# Altium PCB Mini-Rambo-ATX.PcbDoc (part 3 of 3)
Units mil, origin at the board's own origin, x right, y up, seen from the top; angles counter-clockwise.
Board outline 4133.86 x 2795.28 mil, 4 copper layers (Top, GND, Supply, Bottom), stack 61.811 mil thick; 252 components, 203 nets, 844 pads, 559 vias.
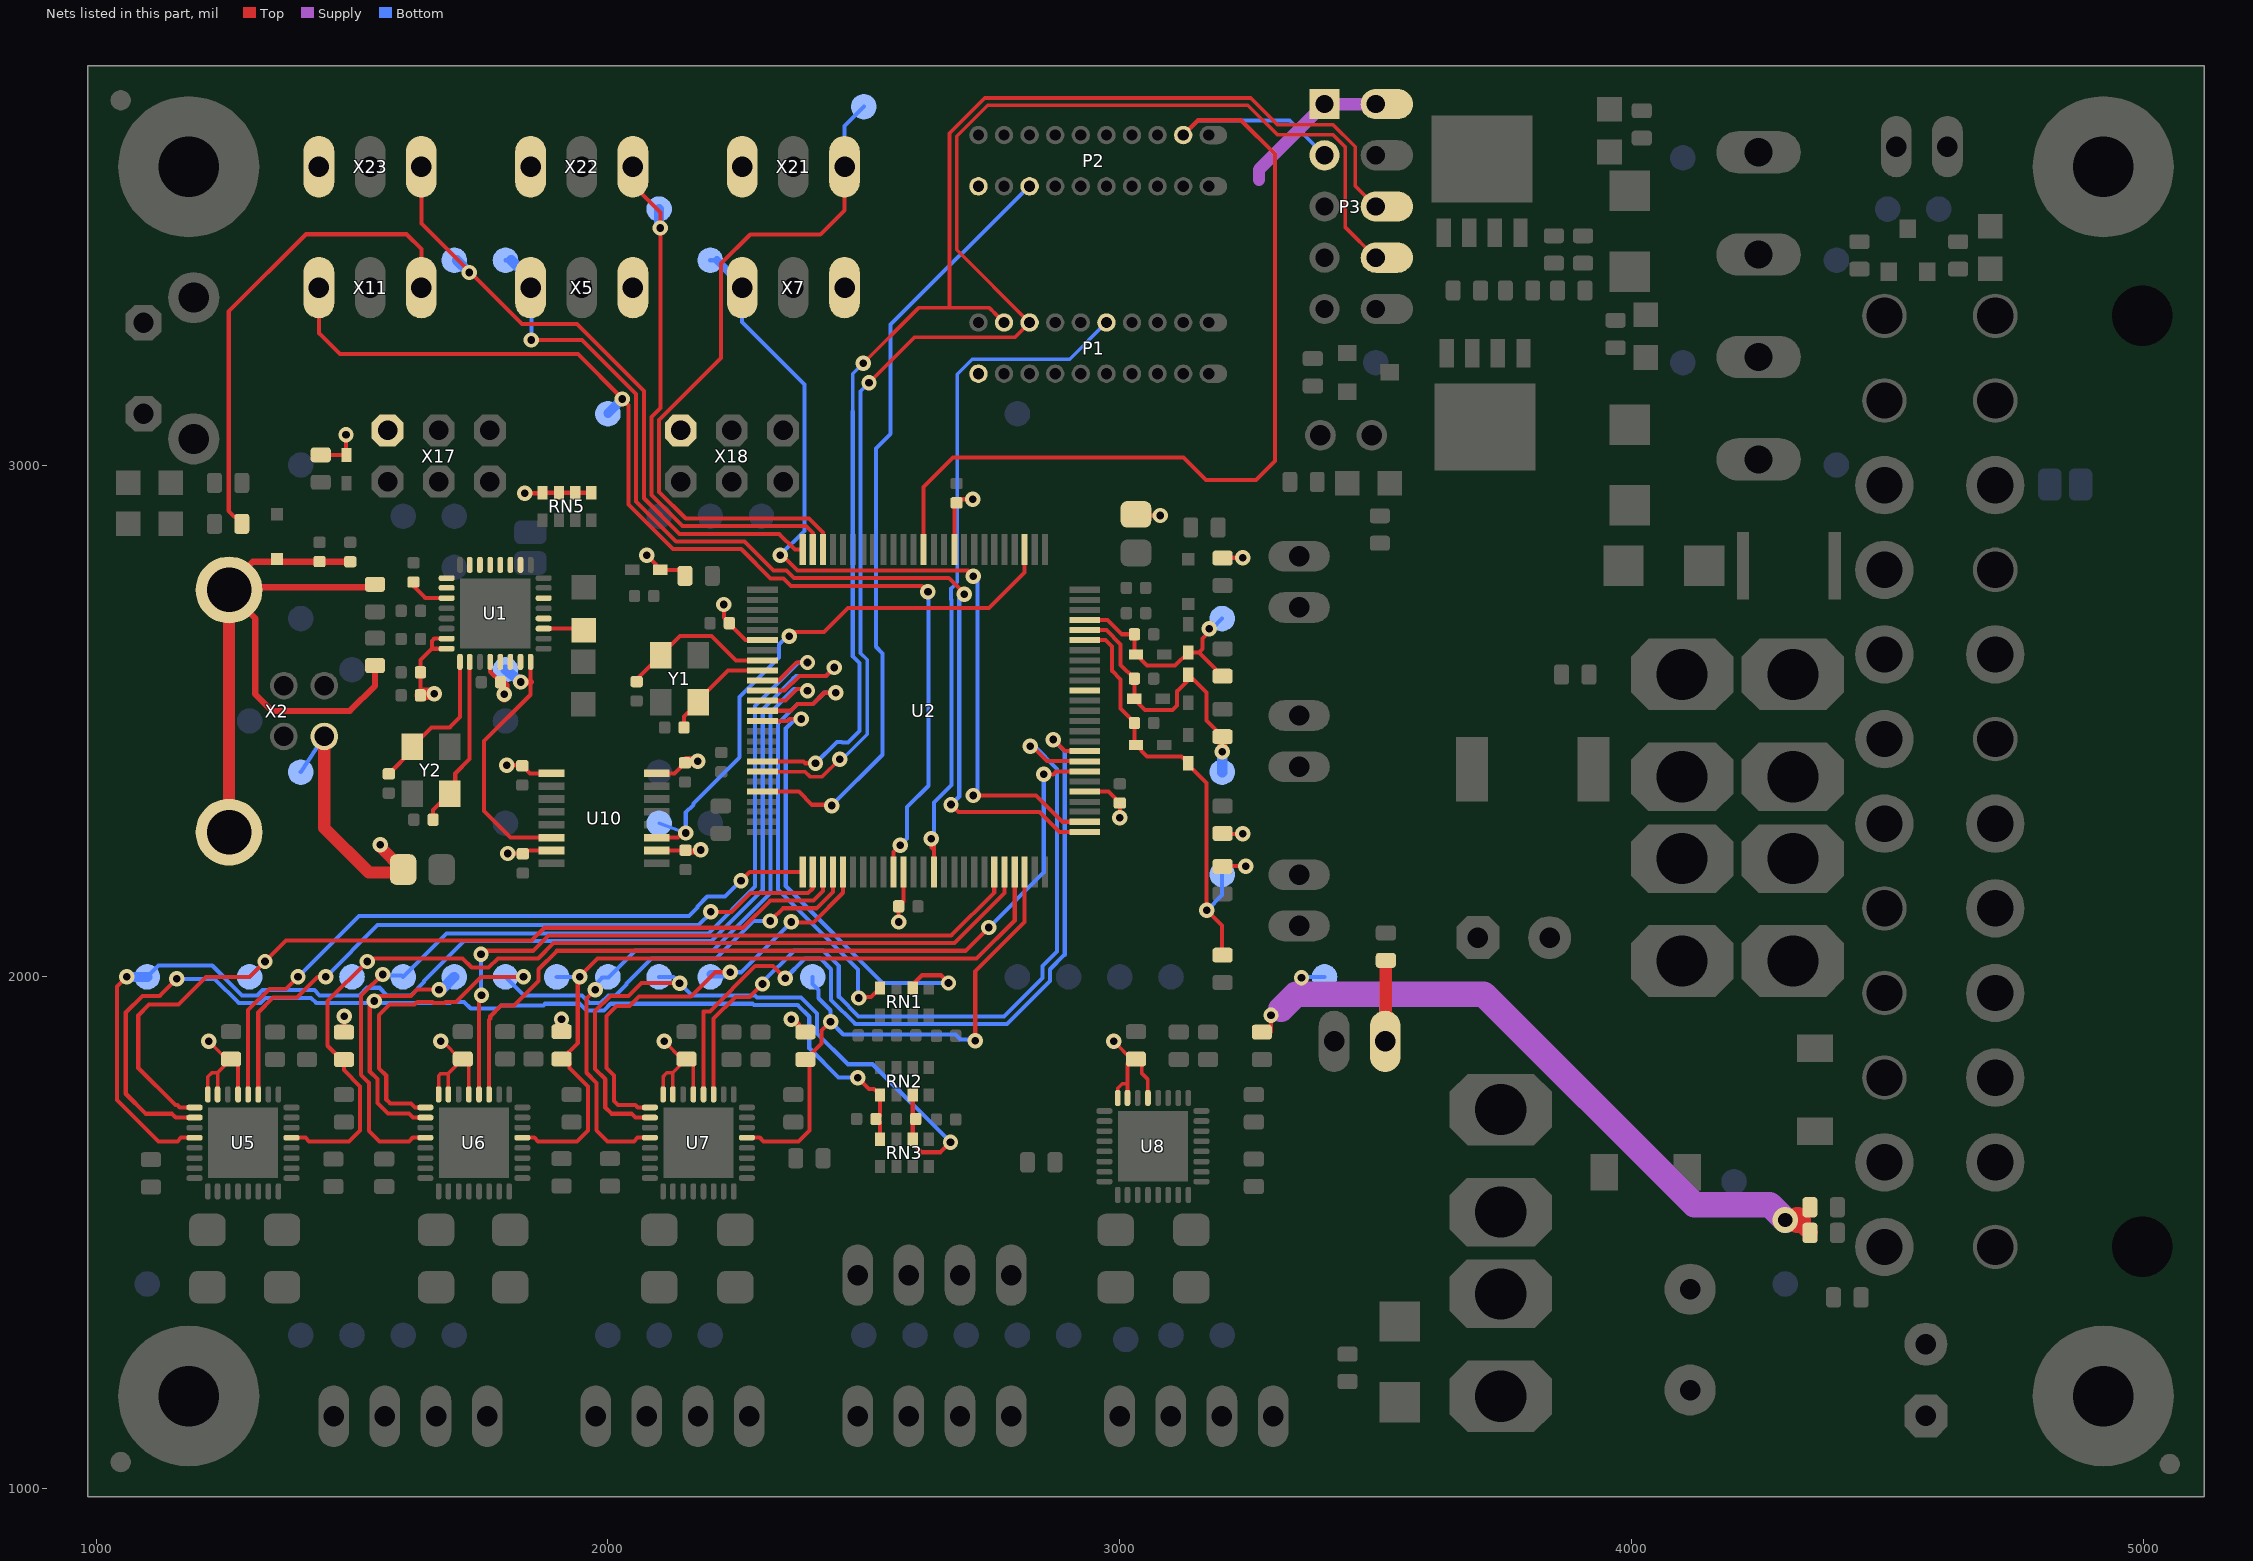
[diagram p5: the nets of this part, all layers, seen from the top]

## Via types
v1: diameter 30, hole 15, Top to Bottom, 422 vias
v2: diameter 30, hole 15, Top to Bottom, tented both sides, 131 vias
v3: diameter 50, hole 28, Top to Bottom, tented both sides, 3 vias
v4: diameter 32, hole 15, Top to Bottom, 1 vias
v5: diameter 30, hole 15, Top to Bottom, tented top, 1 vias
v6: diameter 32, hole 15, Top to Bottom, tented both sides, 1 vias

## Nets (pads, with @x,y where several pads share a name; then routed paths per layer and width w, separated by ;. In a path a pad name is that pad's centre, name@x,y a point inside that pad or via, vN(x,y) a via of type N, cw(c..) or ccw(c..) an arc to the next point about the centre after c; other vN are vias at no path point) (continued)
SCL: P1.P$4 P3.6 U2.43 | length 2617.2
  Top w7: v1(2499,3199) 2606.85,3306.85 2668,3306.85 ; 2755.58,3296.58 2745.32,3306.85 2668,3306.85 ; P3.6@3500,3505 3459.97,3545.03 3459.97,3621.43 3416.43,3664.97 3308.03,3664.97 3256.01,3716.99 2736.22,3716.99 2667.32,3648.09 2667.32,3307.53 2668,3306.85
  Top w8: U2.43@2301.83,2421 2381.89,2421 2385.57,2417.32 v1(2405.51,2417.32) ; 2755.58,3296.58 P1.P$4@2773.82,3278.35
  Bottom w7: 2478.38,3105 2478.38,3178.38 v1(2499,3199)
  Bottom w8: v1(2405.51,2417.32) 2447.38,2459.19 2456.76,2459.19 2457.74,2458.21 2469.38,2458.21 2491.33,2480.15 2491.33,2613.35 2478.38,2626.3 2478.38,3105
SDA: P1.P$6 P3.8 U2.44 | length 2801
  Top w7: U2.44@2301.83,2401 2385.06,2401 2394.74,2391.32 2418.88,2391.32 v1(2452.75,2425.19) ; v1(2510,3161) 2598.85,3249.85 2795.32,3249.85 P1.P$6@2823.82,3278.35 2823.27,3278.35 2681.32,3420.3 2681.32,3642.29 2742.01,3702.99 3250.01,3702.99 3307.97,3645.03 3416.58,3645.03 3440.03,3621.58 3440.03,3464.97 P3.8@3500,3405
  Bottom w7: v1(2452.75,2425.19) 2452.75,2426.42 2445.99,2433.19 2465.58,2433.19 2506.33,2473.94 2506.33,2619.56 2493.38,2632.52 2493.38,3144.38 v1(2510,3161)
THERM0: C59.1 D11.A D13.C R32.1 TP20.TP U2.97 | length 447.1
  Top w8: U2.97@2931.79,2697.17 2976.06,2697.17 3003.94,2669.29 C59.1@3028.54,2669.29 3028.54,2630.91 3029.32,2631.68 3053.08,2607.92 3107.92,2607.92 D11.A@3133.86,2633.86 3154.33,2633.86 ; v2(3175,2680) 3175,2675 3161.42,2661.42 3161.42,2640.94 3154.33,2633.86 ; R32.1@3200.78,2587.4 3154.33,2633.86
  Bottom w8: v2(3175,2680) 3180,2680 TP20.TP@3200,2700
THERM1: C56.1 D14.A D15.C R37.1 TP21.TP U2.96 | length 584.7
  Top w8: U2.96@2931.79,2677.48 2973.65,2677.48 3001.56,2649.58 3001.56,2609.66 C56.1@3028.54,2582.68 D15.C@3028.54,2542.32 ; D15.C@3027.56,2543.31 D15.C@3028.54,2542.32 ; v2(3200,2440) v2@3200.78,2440.78 ; R37.1@3200.78,2469.29 3169.1,2500.98 3169.1,2555.31 D14.A@3133.86,2590.55 3133.86,2579.93 3111.86,2557.93 3111.86,2530.53 3102.63,2521.31 3049.56,2521.31 D15.C@3028.54,2542.32
  Top w20: v2@3200.78,2440.78 R37.1@3200.78,2469.29
  Bottom w20: TP21.TP@3200,2400 v2(3200,2440)
THERM2: C4.1 D1.A D5.C R6.1 TP15.TP U2.95 | length 872
  Top w8: U2.95@2931.79,2657.8 2972.13,2657.8 2984.56,2645.36 2984.56,2598.12 3001.56,2581.12 3001.56,2524.38 3028.54,2497.4 C4.1@3028.54,2496.06 3028.54,2455.71 D5.C@3031.5,2452.76 3053.5,2430.76 3120.43,2430.76 D1.A@3133.86,2417.32 3133.86,2413.82 3169.11,2378.57 3169.11,2296.44 3169.1,2145 3170,2144.1 v2(3170,2130) 3200,2100 3200,2043.3 R6.1@3200.78,2042.52
  Bottom w8: v2(3170,2130) 3200,2160 TP15.TP@3200,2200
THERM3: U2.90
TX0: TP31.TP U2.3 U10.11 | length 1145.9
  Top w8: U10.11@2095.13,2272.04 2136.99,2272.04 v1@2145.3,2280.35 ; v1(2354.33,2665.35) 2354.33,2670.22 2358.04,2673.93 2422.3,2673.93 2469.03,2720.66 2744.09,2720.66 2813.79,2790.35 U2.3@2813.79,2834.96
  Bottom w7: TP31.TP@2100,2300 v1(2152,2281)
  Bottom w8: v1(2152,2281) 2152,2321.23 2167,2336.23 2167,2338.62 2257.41,2429.03 2257.41,2546.85 2334.12,2623.56 2334.12,2649.09 2354.45,2669.42 2354.45,2670.34 2354.33,2670.22 v1(2354.33,2665.35)
TX0-I: TP26.TP U1.8 U10.6 | length 554.7
  Top w8: U1.8@1848.9,2615.51 1848.43,2615.04 1848.43,2566 1848.43,2551.18 1758.17,2460.92 1758.17,2323.91 1810.04,2272.04 U10.6@1889.76,2272.04
  Top w14: v2@1827,2576 1848.43,2576
  Bottom w7: v2@1827,2566 1828,2565 v2(1830,2576)
  Bottom w20: TP26.TP@1800,2600 v2(1830,2576)
TX1: P2.P$5 U2.46 | length 1527.5
  Top w8: U2.46@2301.83,2362 2372.87,2362 2398.67,2336.2 v1@2437,2336.2
  Bottom w8: v1(2437,2334.64) 2536.33,2433.97 2536.33,2631.99 2523.38,2644.94 2523.38,3032.38 2552,3061 2552,3274.11 2822.38,3544.49 P2.P$5@2823.82,3544.49
TX2: P2.P$18 P3.3 U2.13 | length 2000.1
  Top w8: U2.13@2616.79,2834.96 2616.79,2957.26 2674.37,3014.85 3124.76,3014.85 3168.61,2971 3266.2,2971 3302.98,3007.79 3302.98,3607.52 3237.02,3673.49 3152.82,3673.49 P2.P$18@3123.82,3644.49
  Bottom w7: P2.P$18@3123.82,3644.49 3152.32,3672.99 3332.01,3672.99 P3.3@3400,3605
TX3: P1.P$12 U2.64 | length 1353
  Top w8: v1(2631.89,2269.68) 2631.89,2252.93 2636.79,2248.03 ; U2.64@2636.79,2205 2636.79,2248.03 ; v1@2636.79,2271.65 2636.79,2248.03
  Bottom w7: 2670.3,2758.47 2682.5,2770.67 2682.5,3177.33 2712.01,3206.85 2902.32,3206.85 P1.P$12@2973.82,3278.35
  Bottom w8: v1(2631.89,2269.68) 2636.68,2274.48 2636.68,2340.42 2671.33,2375.07 2671.33,2735.91 2670.3,2736.94 2670.3,2758.47
TXL: LED4.C U1.11 | length 79.5
  Top w8: U1.11@1874.49,2680.47 1949.77,2680.47 LED4.C@1952.76,2677.49
U1-PB0: U1.14
U1-PB4: U1.18
U1-PB5: U1.19
U1-PB6: U1.20
U1-PB7: U1.21
U1-PC2: U1.5
U1-PC4: U1.26
U1-PC5: U1.25
U1-PC6: U1.23
U1-PC7: U1.22
U1-PD0: U1.6
U1-PD1: U1.7
U1-PD6: U1.12
USBVCC: C2.2 C11.1 C14.1 C15.1 C67.2 C70.1 D4.C R47.2 RN5.1 RN5.2 RN5.3 RN5.4 TP46.TP U1.4 U1.31 U1.32 U10.1 U10.7 X2.1 X17.2 | length 1208.3
  Top w8: R47.2@1438.97,3019.89 1439.17,3019.69 D4.C@1489.17,3019.69 1488.19,3020.67 v1(1488.19,3059.06) ; C11.1@1633.7,2550 C15.1@1633.7,2595 1633.7,2618.7 1656.1,2641.1 ; U1.32@1685,2641.1 1656.1,2641.1 ; U1.31@1685,2660.79 1660.79,2660.79 1656.1,2656.1 1656.1,2641.1 ; U1.4@1770,2615.51 1770,2596.14 C14.1@1790.35,2575.79 C14.1@1797.24,2568.9 ; v1(1802.17,2413.39) 1831.69,2413.39 C70.1@1832.68,2412.4 1847.54,2397.54 U10.1@1889.76,2397.54 ; v1(1804.13,2241.14) 1832.98,2241.14 C67.2@1833.66,2240.46 1840.24,2247.04 U10.7@1889.76,2247.04 ; v1(1837.6,2944.88) 1871.29,2944.88 RN5.4@1872.28,2945.87 RN5.3@1904.28,2945.87 RN5.2@1936.02,2945.87 RN5.1@1967.52,2945.87
  Top w20: v1@1797.24,2546.26 C14.1@1797.24,2568.9
  Top w24: X2.1@1445.84,2469.68 1445.84,2290.9 1533,2203.74 1593.89,2203.74 C2.2@1599.8,2209.65 1555.12,2254.32 v1(1555.12,2257.87) ; C11.1@1633.7,2550 1636.85,2553.15 v1(1660.43,2553.15)
  Bottom w8: TP46.TP@1400,2400 X2.1@1445.84,2469.68
  other v1: 1797.24,2552
USHIELD: C63.1 D16.A R72.2 RV1.1 RV2.1 X2.P$1 X2.P$2 | length 1561.9
  Top w12: X2.P$1@1257.58,2753.64 1250,2761.22 X2.P$1@1256.22,2761.22 ; X2.P$1@1259.84,2751.38 1311,2700.22 1311,2552.33 1343.64,2519.68 1496.06,2519.68 1545,2568.62 RV1.1@1545,2608.23 ; R72.2@1496.5,2811.01 1306.01,2811.01 X2.P$1@1256.22,2761.22 ; RV2.1@1539.45,2761.22 X2.P$1@1256.22,2761.22
  Top w24: X2.P$2@1259.84,2282.68 1259.84,2751.38 X2.P$1@1259.84,2755.91
VCC: C7.1 C8.1 C9.1 C17.1 C18.1 C23.1 C24.1 C25.1 C52.1 C68.2 C69.1 D3.C L2.1 P1.P$1 P2.P$1 P3.1 P3.2 R5.2 R31.2 R35.1 R36.2 R46.2 R59.1 R60.1 R61.1 R62.1 R74.1 R75.2 TP32.TP U2.10 U2.31 U2.61 U2.80 U5.13 U5.15 U5.16 U6.13 U6.15 U6.16 U7.13 U7.15 U7.16 U8.13 U8.15 U8.16 U10.10 U10.16 X1.2 X5.3 X7.3 X11.3 X18.2 X21.3 X22.3 X23.3 | length 4917.8
  Top w7: U5.16@1218.4,1770.5 1218.4,1805.02 1226.38,1812.99 1237.4,1812.99 ; v2(1220.47,1874.02) 1255.12,1839.37 C24.1@1263.78,1839.37 ; U5.15@1237.4,1770.5 1237.4,1812.99 ; U5.13@1277.4,1770.5 1277.4,1825.75 C24.1@1263.78,1839.37 ; U6.16@1669.31,1770.5 1669.31,1807.1 1673.35,1811.14 1688.31,1811.14 ; v2(1673.23,1874.02) 1677.17,1874.02 1711.81,1839.37 C23.1@1716.54,1839.37 ; U6.15@1688.31,1770.5 1688.31,1811.14 ; U6.13@1728.31,1770.5 1728.31,1827.6 C23.1@1716.54,1839.37 ; U7.16@2107.93,1770.5 2107.93,1805.46 2115.23,1812.76 2126.93,1812.76 ; v2(2110.24,1874.02) 2144.88,1839.37 C18.1@2153.54,1839.37 ; U7.15@2126.93,1770.5 2126.93,1812.76 ; U7.13@2166.93,1770.5 2166.93,1825.98 C18.1@2153.54,1839.37 ; v2(2988.19,1874.02) C17.1@3022.83,1839.37 ; U8.16@2995.96,1763.61 2995.96,1782.73 3004.57,1791.34 3014.96,1791.34 ; U8.15@3014.96,1763.61 3014.96,1791.34 ; U8.13@3054.96,1763.61 3054.96,1799.37 3043.23,1811.1 3043.23,1827.64 C17.1@3031.5,1839.37 C17.1@3022.83,1839.37 ; 1237.4,1812.99 C24.1@1263.78,1839.37 ; 1688.31,1811.14 C23.1@1716.54,1839.37 ; 2126.93,1812.76 C18.1@2153.54,1839.37 ; 3014.96,1791.34 3014.96,1831.5 C17.1@3022.83,1839.37
  Top w8: R35.1@1284.77,2885 1259.2,2910.57 1259.2,3299.56 1410.43,3450.79 1606.3,3450.79 1635.43,3421.65 X11.3@1635.43,3346.46 ; R60.1@1484.26,1891.93 1485,1892.67 v1(1485,1923) ; v1(2075.79,2823.82) 2102.36,2797.24 D3.C@2102.36,2795.28 2138.58,2795.28 R46.2@2150.39,2783.46 ; U10.10@2095.13,2247.04 2151.27,2247.04 C68.2@2151.57,2247.35 2151.87,2247.05 2180.12,2247.05 2176.42,2243.35 C68.2@2161.49,2243.35 ; U10.16@2095.13,2397.54 2129.82,2397.54 C69.1@2150.59,2418.31 C69.1@2153.66,2421.38 ; v1(2226.38,2727.36) 2226.38,2701.77 C9.1@2237.2,2690.94 2237.2,2689.02 2268.43,2657.8 U2.31@2301.83,2657.8 ; v1(2567.91,2107.28) C7.1@2567.91,2137.8 2577.42,2147.3 U2.61@2577.42,2205 ; U2.10@2676.79,2834.96 2676.79,2921.87 C52.1@2681.1,2926.18 2687.99,2933.07 v1(2712.6,2933.07) ; U2.80@2931.79,2362 2977.57,2362 C8.1@3000,2339.57 3000,2311.02 v1@2997.57,2308.59 ; v1@2997.6,2308.59 v1(3000.15,2311.14) ; L2.1@3031.5,2903.54 3033.47,2901.57 3078.74,2901.57 v1(3078.89,2901.42) ; R5.2@3200.78,2215.75 3201.57,2216.54 v1@3240.16,2216.54 ; R36.2@3200.79,2280.31 3201.57,2279.53 v1(3240.16,2279.53) ; R31.2@3200.78,2818.11 3201.57,2818.9 v1(3240.16,2818.9) ; R62.1@3295.28,1892.1 v1(3295.28,1925.19)
  Top w12: v1(2358.27,1917.32) 2360.61,1917.32 R61.1@2385.83,1892.1
  Top w20: C69.1@2153.66,2421.38 v1(2175.3,2421.38)
  Top w24: X1.2@3518.5,1874.02 3519.68,1875.2 C25.1@3519.68,2032.28
  Top w32: v3(4300,1525) 4323.23,1525 R74.1@4348.23,1500
  Top w50: v3@4323.23,1525 4325,1525
  Supply w8: 3343.97,1966.02 3355,1977.05 v2(3355,1998)
  Supply w24: 3272,3557 3272,3577 P3.1@3400,3705 P3.2@3500,3705 ; 3515.75,1966.02 3518.5,1963.26 X1.2@3518.5,1874.02
  Supply w50: 3314.96,1937.01 3343.97,1966.02 3515.75,1966.02 3711.15,1966.02 4122.05,1555.12 4269.88,1555.12 v3(4300,1525)
  Bottom w8: v2(3355,1998) 3357,2000 TP32.TP@3400,2000
  other v1: 1909.45,1917.32 3246,2216 2181.1,2248.03
VUCAP: C16.1 U1.27 | length 74.6
  Top w8: C16.1@1620,2763.23 1643.23,2740 U1.27@1685,2740
X-DIR: TP1.TP U2.36 U5.20 | length 2504.4
  Top w8: v2(1060,2000) 1041.01,1981.01 1041.01,1759.21 1121.69,1678.54 1158.99,1678.54 1166.31,1685.85 U5.20@1192.4,1685.85 ; U2.36@2301.83,2559.37 2345.24,2559.37 2374.04,2588.17 2425.76,2588.17 v1(2442.05,2604.46)
  Bottom w8: TP1.TP@1100,2000 1122.06,2022.06 1227.03,2022.06 1285.09,1964 1314.91,1964 1324.91,1974 1426.5,1974 1436.5,1964 1514.91,1964 1529.66,1978.75 1554.07,1978.75 1568.83,1964 1614.91,1964 1640.91,1990 1640.91,1991.82 1719.09,2070 2202.38,2070 2302.41,2170.03 2302.41,2522.69 2361.91,2582.19 2361.91,2582.75 2367.33,2588.17 2425.76,2588.17 v1(2442.05,2604.46)
  Bottom w20: v2(1060,2000) TP1.TP@1100,2000
X-EN: R60.2 TP4.TP U2.71 U5.5 | length 1935.6
  Top w8: U5.5@1381.89,1685.85 1408.84,1685.85 1416.15,1678.54 1494.26,1678.54 1515.94,1700.21 1515.94,1786.06 1484.26,1817.74 R60.2@1484.26,1838.38 1479.62,1838.38 1452.57,1865.43 1452.57,1952.57 v2(1530,2030) 1536,2036 1716,2036 1734,2018 1767.09,2018 1785.09,2036 1863.88,2036 1893.88,2066 2676.87,2066 2774.79,2163.92 U2.71@2774.79,2205
  Bottom w8: TP4.TP@1500,2000 v2(1530,2030)
X-MAX: TP39.TP U2.76 X5.1 | length 2063.7
  Top w8: v1(1850.39,3244.09) 1949.67,3244.09 2055.13,3138.64 2055.13,2928.86 2133.43,2850.56 2266.67,2850.56 2323.69,2793.54 2349.21,2793.54 2363.8,2778.96 2665.92,2778.96 2696.3,2748.58 v1(2696.3,2747.7) ; v1(2670.28,2336.61) 2684.78,2322.11 2843.24,2322.11 2882.35,2283 U2.76@2931.79,2283
  Bottom w8: TP39.TP@1800,3400 TP39.TP@1811,3400 ; X5.1@1848.82,3362.18 X5.1@1848.82,3346.46 1850.39,3344.88 v1(1850.39,3244.09) ; v1(2670.28,2336.61) 2686.33,2352.67 2686.33,2737.74 v1(2696.3,2747.7)
  Bottom w20: TP39.TP@1811,3400 X5.1@1848.82,3362.18
X-MIN: TP38.TP U2.25 X23.1 | length 1287.6
  Top w8: X23.1@1635.43,3582.68 1635.43,3471.86 v2@1731.29,3376 ; v2(1729,3376) v2@1731.29,3376 ; v2@1735,3376 v2@1731.29,3376 ; U2.25@2380.57,2834.96 2365.24,2834.96 2334.65,2865.56 2139.64,2865.56 2070.13,2935.08 2070.13,3144.86 1939.53,3275.46 1831.84,3275.46 v2@1731.29,3376
  Bottom w8: TP38.TP@1700,3400 TP38.TP@1705,3400
  Bottom w20: TP38.TP@1705,3400 v2(1729,3376)
X-MS1: U2.52 U5.11 | length 1378.1
  Top w8: U5.11@1316.93,1770.5 1316.93,1930.74 1345.83,1959.65 1392.72,1959.65 1433.07,2000 v1(1448.82,2000) ; v1(2200.89,2127.07) 2202,2127.07 2241.25,2127.07 2278.17,2164 2391.12,2164 2400.25,2173.13 U2.52@2400.25,2205
  Bottom w8: v1(1448.82,2000) 1549.82,2101 2177,2101 2202,2126 v1(2200.89,2127.07)
X-MS2: U2.51 U5.12 | length 1361
  Top w8: U5.12@1297.24,1770.5 1297.24,1935.1 1338.79,1976.65 1371.06,1976.65 v1(1394.42,2000) ; v1(2260,2188) 2277,2205 U2.51@2380.57,2205
  Bottom w8: v1(1394.42,2000) 1513.42,2119 2158.23,2119 2174.89,2135.66 2174.89,2137.84 2194.05,2157 2229,2157 v1(2260,2188)
X-STEP: TP2.TP U2.53 U5.17 | length 1762.5
  Top w8: U5.17@1192.4,1744.91 1163.56,1744.91 1158.93,1749.54 1155.21,1749.54 1082.48,1822.26 1082.48,1924.84 1103.64,1946 1160.77,1946 1214.77,2000 1300,2000 v2(1330,2030) 1371,2071 1851,2071 1876,2096 2264.21,2096 2317.21,2149 2401.5,2149 2419.94,2167.44 U2.53@2419.94,2205
  Bottom w8: TP2.TP@1300,2000 v2(1330,2030)
XT1: C13.1 U1.1 Y2.1 | length 297.2
  Top w8: C13.1@1571.85,2396.65 1617.54,2442.34 Y2.1@1617.54,2449.4 1655.54,2487.4 1690.94,2487.4 1711,2507.45 U1.1@1711,2615.51
XT2: C12.1 U1.2 Y2.3 | length 313.6
  Top w8: C12.1@1658.46,2307.09 1658.46,2325.63 Y2.3@1690.95,2358.12 ; Y2.3@1703.74,2378.94 1701.77,2380.91 1701.77,2397.66 1729.65,2425.54 1729.65,2615.17 U1.2@1730,2615.51
XTAL1: C57.1 U2.34 Y1.1 | length 214.5
  Top w8: C57.1@2148.62,2487.2 2148.62,2508.77 Y1.1@2176.56,2536.72 2176.56,2540.96 2234.35,2598.74 U2.34@2301.83,2598.74
XTAL2: C58.1 U2.33 Y1.3 | length 304.8
  Top w8: C58.1@2056.1,2576.77 2056.1,2580.95 Y1.3@2103.15,2627.99 2141.15,2665.99 2202.53,2665.99 2250.1,2618.43 U2.33@2301.83,2618.43
XY-REF: C48.1 RN2.5 RN3.4 TP6.TP U5.18 U6.18 | length 2556.3
  Top w8: v1(1157.48,1996.06) 1124.42,1963 1090.74,1963 1058.01,1930.28 1058.01,1771.71 1097.19,1732.54 1107.88,1732.54 1148.37,1732.54 1155.69,1725.22 U5.18@1192.4,1725.22 ; U6.18@1643.31,1725.22 1619.07,1725.22 1611.02,1733.27 1570.45,1733.27 1549.94,1753.79 1549.94,1800.14 1534.69,1815.39 1534.69,1944.14 v1(1543.3,1952.75) 1553.55,1963 1615.33,1963 1627.33,1975 v2(1670,1975) ; v1(2488.19,1803.15) 2510.04,1781.3 2519.68,1781.3 RN2.5@2531.72,1769.26 2531.72,1727.59 2526.57,1722.44 2531.72,1717.29 RN3.4@2531.72,1683.07
  Bottom w8: v1(1157.48,1996.06) 1231.81,1996.06 1278.88,1949 1321.12,1949 1331.12,1959 1420.29,1959 1430.29,1949 1539.55,1949 v1(1543.3,1952.75) 1547.06,1949 1691.76,1949 1693.95,1951.2 1718.8,1951.2 1732,1938 1785.08,1938 1791.48,1944.4 1874.02,1944.4 1877.17,1947.56 1944.46,1947.56 1958.02,1934 1991.98,1934 2005.54,1947.56 2282.46,1947.56 2285.27,1944.74 2370.78,1944.74 2393.4,1922.12 2393.4,1860.6 2450.85,1803.15 v1(2488.19,1803.15) ; v2(1670,1975) v2@1675,1975
  Bottom w20: v2@1675,1975 TP6.TP@1700,2000
XY-REF-PWM: RN1.4 U2.38 | length 950.6
  Top w8: U2.38@2301.83,2520 2357.25,2520 2370.3,2533.05 2400.53,2533.05 2422.6,2555.12 v1(2444.88,2555.12) ; v1(2490.28,1958.76) 2490.06,1958.76 2488.19,1960.63 2514.01,1960.63 RN1.4@2531.72,1978.35
  Bottom w8: v1(2444.88,2555.12) 2422.6,2555.12 2400.53,2533.05 2370.3,2533.05 2332.41,2495.16 2332.41,2170.54 2488.19,2014.76 2488.19,1960.63 2490.06,1958.76 v1(2490.28,1958.76)
Y-DIR: TP0.TP U2.35 U6.20 | length 1847.8
  Top w8: v2(1560,2004.75) 1540.25,1985 1538.78,1985 1517.3,1963.52 1517.3,1808.73 1532.94,1793.1 1532.94,1699.35 1553.57,1678.71 1611.58,1678.71 1618.72,1685.85 U6.20@1643.31,1685.85 ; U2.35@2301.83,2579.06 2333.7,2579.06 2368.82,2614.17 v1(2389.76,2614.17)
  Bottom w8: v2(1560,2004.75) 1561.75,2003 1597,2003 TP0.TP@1600,2000 1685,2085 2196.16,2085 2287.41,2176.24 2287.41,2528.9 2346.91,2588.41 2346.91,2588.96 2372.13,2614.17 v1(2389.76,2614.17)
Y-EN: R59.2 TP7.TP U2.72 U6.5 | length 1500.8
  Top w8: U6.5@1832.8,1685.85 1856.12,1685.85 1863.26,1678.71 1939.31,1678.71 1960.82,1700.21 1960.82,1786.01 1925.2,1821.63 1925.2,1834.45 R59.2@1921.26,1838.38 ; R59.2@1909.45,1839.37 1941.14,1871.05 v2@1941.14,1997.14 ; v2@1944.5,2000.5 1980,2036 2720.41,2036 2794.79,2110.38 U2.72@2794.79,2205
  Bottom w8: TP7.TP@1900,2000 v2(1945,2000)
Y-MAX: TP41.TP U2.77 X7.1 | length 1749.4
  Top w8: v1(2336.61,2823.82) 2340.15,2823.82 2370.01,2793.96 2703.35,2793.96 2713.72,2783.6 v1(2713.72,2782.62) ; v1(2713.58,2354.33) 2836.61,2354.33 2887.94,2303 U2.77@2931.79,2303
  Bottom w8: TP41.TP@2200,3400 TP41.TP@2213,3400 ; X7.1@2262.2,3350.8 X7.1@2262.2,3346.46 2262.2,3279.13 2384.13,3157.21 2384.13,2871.33 v1(2336.61,2823.82) ; v1(2713.58,2354.33) 2722.3,2363.05 2722.3,2774.03 v1(2713.72,2782.62)
  Bottom w16: TP41.TP@2213,3400 X7.1@2262.2,3350.8
Y-MIN: TP40.TP U2.24 X22.1 | length 1086.9
  Top w8: X22.1@2048.82,3582.68 2048.82,3547.18 2103,3493 2103,3111.7 2085.13,3093.83 2085.13,2941.29 2145.86,2880.56 2386.52,2880.56 2400.25,2866.83 U2.24@2400.25,2834.96
  Bottom w8: v2@2100,3465 v2(2102,3463)
  Bottom w20: v2@2100,3465 TP40.TP@2100,3500
Y-MS1: U2.82 U6.11 | length 1639.1
  Top w8: U6.11@1767.84,1770.5 1767.84,1916.1 1770.09,1918.36 1770.09,1923.01 1791.48,1944.4 1816.53,1944.4 1864,1991.88 1864,2014.91 1900.09,2051 2698.64,2051 v1(2744.09,2096.46) ; v1(2851.38,2395.67) 2870.08,2395.67 2875.41,2401 U2.82@2931.79,2401
  Bottom w8: v1(2744.09,2096.46) 2851.38,2203.74 v1(2851.38,2395.67)
Y-MS2: U2.70 U6.12 | length 1370.4
  Top w8: v1@1747,1960 v1@1748.15,1960 ; U6.12@1748.15,1770.5 v1@1748.15,1960 ; v1(1752,2044) 1759,2051 1854,2051 1884,2081 2670.66,2081 2754.79,2165.13 U2.70@2754.79,2205 ; v1(1753,1964) 1749,1960 v1@1748.15,1960
  Bottom w8: v1(1752,2044) 1752,1965 v1(1753,1964)
Y-STEP: TP5.TP U2.54 U6.17 | length 1398.3
  Top w8: U6.17@1643.31,1744.91 1623.42,1744.91 1615.37,1752.95 1574.81,1752.95 1566.94,1760.83 1566.94,1807.18 1552.69,1821.43 1552.69,1925.11 1573.58,1946 1622.37,1946 1627.58,1951.21 1657.02,1951.21 1659.23,1949 1680.77,1949 1682.98,1951.21 1703.44,1951.21 1752.23,2000 v2(1835,2000) ; v1@2320.87,2107.28 2320.87,2113.19 2341.68,2134 2407.71,2134 2439.62,2165.91 U2.54@2439.62,2205
  Bottom w8: v2(1835,2000) TP5.TP@1800,2000 1836,1964 1949.23,1964 1964.23,1949 1985.77,1949 2000.77,1964 2014.91,1964 2036,1985.09 2036,1986.91 2085.09,2036 2210.8,2036 2284.06,2109.25 v1(2316.93,2109.25) ; v1@2316.93,2107.28 v1@2320.87,2107.28
Z-DIR: TP19.TP U2.37 U7.20 | length 1407.4
  Top w8: v2(1975,1975) 1958.14,1958.14 1958.14,1812.73 1977.82,1793.05 1977.82,1700.33 1999.44,1678.71 2050.55,1678.71 2057.7,1685.85 U7.20@2081.93,1685.85 ; U2.37@2301.83,2539.69 2346.77,2539.69 2369.22,2562.13 2387.91,2562.13 2387.91,2566.07 2389.76,2564.22 v1(2389.76,2559.05)
  Bottom w8: v2(1975,1975) 1965,1975 1989,1999 2001,1999 2053,2051 2204.59,2051 2317.41,2163.82 2317.41,2516.48 2363.07,2562.13 2387.91,2562.13 2387.91,2566.07 2389.76,2564.22 v1(2389.76,2559.05)
Z-EN: R61.2 TP10.TP U2.73 U7.5 | length 1139.2
  Top w8: U7.5@2271.42,1685.85 2296.64,1685.85 2303.78,1678.71 2372.38,1678.71 2393.89,1700.21 2393.89,1830.49 R61.2@2385.83,1838.55 2417.52,1870.24 2417.52,1895 v2(2435,1912.48) ; v1(2717.52,1875) 2717.52,2010.83 2813.79,2107.09 U2.73@2813.79,2205
  Bottom w8: TP10.TP@2400,2000 2400,1986 2411.26,1974.74 2411.54,1974.74 2411.54,1958.3 2435,1934.84 v2(2435,1912.48) 2459.73,1887.76 2679.04,1887.76 2688.98,1877.82 v1@2717.52,1877.82
Z-MAX: TP49.TP U2.60 X11.1 | length 2219
  Top w8: X11.1@1435.43,3346.46 1435.43,3257.48 1476.38,3216.54 1941.46,3216.54 2028,3130 v2(2028,3129) 2040.13,3116.87 2040.13,2922.65 2127.22,2835.56 2260.46,2835.56 2317.47,2778.54 2343,2778.54 2357.58,2763.96 2613.27,2763.96 v1(2625.13,2752.1) ; U2.60@2557.73,2205 2557.73,2243.74 v1(2570.99,2257)
  Bottom w8: TP49.TP@2000,3100 TP49.TP@2000,3101 ; v1(2570.99,2257) 2584.54,2270.54 2584.54,2331.58 2626.33,2373.38 2626.33,2750.9 v1(2625.13,2752.1)
  Bottom w18: TP49.TP@2000,3101 v2(2028,3129)
Z-MIN: TP48.TP U2.23 X21.1 | length 1384.3
  Top w8: U2.23@2419.94,2834.96 2419.94,2868.36 2392.74,2895.56 2152.07,2895.56 2100.13,2947.5 2100.13,3087.62 2221.2,3208.69 2221.2,3393.44 2278.06,3450.29 2414.86,3450.29 2462.2,3497.64 X21.1@2462.2,3582.68
  Bottom w8: X21.1@2462.2,3582.68 2462.2,3662.2 TP48.TP@2500,3700
Z-MS1: U2.83 U7.11 | length 1563.6
  Top w8: U7.11@2206.46,1770.5 2206.46,1918.41 2249.04,1961 2277,1961 v1(2302,1986) ; v1@2835.63,2443.9 2857.86,2421.67 2931.12,2421.67 U2.83@2931.79,2421
  Bottom w8: v1(2302,1986) 2302,1989.68 2363.32,2051 2421.12,2051 2451,2021.12 2451,1961.27 2489.45,1922.82 2773.73,1922.82 2849,1998.09 2849,2021.12 2877.38,2049.5 2877.38,2406.44 2833.03,2450.79 v1(2824.8,2450.79)
Z-MS2: U2.84 U7.12 | length 1595.8
  Top w8: U7.12@2186.77,1770.5 2186.77,1932.77 2199.54,1932.77 2287.77,2021 2322.82,2021 v1(2346.46,1997.37) ; v1(2870.08,2463.58) 2892.66,2441 U2.84@2931.79,2441 ; U2.84@2931.79,2442 U2.84@2938.98,2442
  Bottom w8: v1(2346.46,1997.37) 2385.09,2036 2414.91,2036 2436,2014.91 2436,1955.05 2483.23,1907.82 2779.94,1907.82 2864,1991.88 2864,2014.91 2892.38,2043.29 2892.38,2441.28 v1(2870.08,2463.58)
Z-REF: C22.1 RN2.7 RN3.2 TP9.TP U7.18 | length 1393.3
  Top w8: U7.18@2081.93,1725.22 2053.68,1725.22 2046.19,1732.71 2007.19,1732.71 1994.82,1745.08 1994.82,1800.09 1975.14,1819.77 1975.14,1933.03 2005.11,1963 2040.42,1963 2065.3,1987.88 v2(2140,1987.88) ; RN2.7@2595.47,1769.26 2595.47,1728.35 C22.1@2601.38,1722.44 2595.47,1716.54 RN3.2@2595.47,1683.07 2595.47,1674.6 2612.59,1657.48 2649.61,1657.48 v1(2669.29,1677.17)
  Bottom w8: TP9.TP@2100,2000 2127.88,2000 v2(2140,1987.88) 2163.88,1964 2287.23,1964 2291.23,1960 2314.74,1960 2315,1959.74 2376.99,1959.74 2408.4,1928.33 2408.4,1889.6 2468.68,1829.32 2517.14,1829.32 v1(2669.29,1677.17)
Z-REF-PWM: RN1.2 U2.39 | length 918.7
  Top w8: U2.39@2302.39,2499.44 U2.39@2301.83,2500 2350.39,2500 2354.33,2503.93 v1(2377.95,2503.93) ; RN1.2@2595.47,1971.29 RN1.2@2595.47,1978.35 2595.47,1985.41 2613.26,2003.19 2650.35,2003.19 v1(2665.35,1988.19)
  Bottom w8: v1(2377.95,2503.93) 2366.14,2503.93 2347.41,2485.2 2347.41,2177.2 2536.42,1988.19 v1(2665.35,1988.19)
Z-STEP: TP8.TP U2.55 U7.17 | length 890.8
  Top w8: U7.17@2081.93,1744.91 2058.24,1744.91 2053.44,1749.71 2019.98,1749.71 2011.82,1757.87 2011.82,1807.3 1996.87,1822.25 1996.87,1923.41 2016.79,1943.32 2041.96,1943.32 2060.51,1961.88 2161.88,1961.88 2209,2009 v2(2239,2009) ; v1(2358.38,2107.39) 2358.38,2106.41 2358.27,2106.3 2401.22,2106.3 2459.31,2164.38 U2.55@2459.31,2205
  Bottom w8: v2(2239,2009) 2260,2009 v1(2358.38,2107.39)
  Bottom w16: TP8.TP@2201,2005 v2@2240,2005
pads on no net: FID1.1 FID2.1 FID3.1 J1.0 J1.1 J1.2 J1.4 J1.6 J1.8 J1.12 J1.13 J1.14 J1.20 J1.21 J1.22 RN1.3 RN3.3 RN5.8 U5.2 U5.4 U5.21 U5.23 U5.26 U5.28 U5.29 U5.31 U6.2 U6.4 U6.21 U6.23 U6.26 U6.28 U6.29 U6.31 U7.2 U7.4 U7.21 U7.23 U7.26 U7.28 U7.29 U7.31 U8.2 U8.4 U8.21 U8.23 U8.26 U8.28 U8.29 U8.31 U10.13
copper on no net:
  other v2: 2893.7,1917.32 2984.25,1917.32

## Polygon pours and split planes (outlines as drawn)
12V-IN on Bottom "12VIN-Bot" (solid, remove dead copper, pour order 52): 4744.09,1547.24 4744.09,1881.89 4696.85,1929.13 4460.63,1929.13 4440.94,1948.82 4271.65,1948.82 4177,2043.47 4177,2267.72 3952.76,2267.72 3937.01,2251.97 3937.01,1858.27 4248.03,1547.24
NetD10_A on Bottom "HB-Bot" (solid, pour order 58): 3535,3207 3536,3208.78 3610.24,3209.12 3618,3209 3625.98,3208.66 3925.2,3208.66 3933.07,3216.54 3933.07,3287.4 3944.88,3299.21 4011.81,3299.21 4031.5,3279.53 4031.5,2917.32 3937.01,2822.83 3937.01,2661.42 3854.33,2578.74 3560.26,2578.74 3536,2625.25
GND1 on Bottom "Top-GND1" (solid, pour order 37): 1022.64,2146.65 1854.33,2146.65 1933.07,2225.39 1933.07,2453.74 1990.16,2510.83 1990.16,2970.47 1835.63,3125 1482.28,3125 1355.32,2998.03 1356.3,2997.05 1356.3,2834.65 1022.64,2834.65
GND on Bottom "Btm-MotorThermal" (solid, pour order 43): 1047.24,1905.51 1047.24,1200.79 1196.85,1051.18 3543.31,1051.18 3629.92,1137.8 3629.92,1818.9 3496.06,1952.76 1094.49,1952.76 1047.24,1905.51
NetD6_A on Bottom "Heat-Bot" (solid, pour order 56): 3588,3667 3598.17,3677.17 4106.3,3677.17 4133.86,3649.61 4133.86,3429.13 4110.24,3405.51 3610.49,3405.51 3588,3428
GND on Bottom "Btm-GND" (solid, remove dead copper, pour order 60): 1023.62,3503.94 1023.62,2874.02 1102.36,2795.28 1417.32,2795.28 1850.39,2362.2 1850.39,2165.35 2380.47,2165.35 2519.68,2026.13 3485.68,2026.13 3661.42,1850.39 3661.42,1102.36 3700.79,1062.99 4921.26,1062.99 5039.37,1181.1 5039.37,3543.31 4836.68,3746 1265.68,3746
NetD10_A on Bottom "Bed" (solid, pour order 36): 4025,3103 4046,3124 4337,3124 4365,3152 4365,3249 4314.79,3299.21 3987.07,3299.21 3987.07,3111.93 3996,3103
+12V3 on Bottom "Bot-HeatBed" (solid, pour order 49): 3921.26,2385.83 3948.82,2358.27 4212.6,2358.27 4224.41,2370.08 4224.41,2653.54 4425.2,2854.33 4425.2,3058.8 4371,3113 4103,3113 4047.24,3057.24 4047.24,2742.01 3921.26,2616.02
12V-IN on Supply "12VIN-Bot" (solid, pour order 53): 4744.09,1547.24 4744.09,1881.89 4696.85,1929.13 4460.63,1929.13 4440.94,1948.82 4271.65,1948.82 4216.54,2003.94 4216.54,2267.72 3952.76,2267.72 3937.01,2251.97 3937.01,1858.27 4248.03,1547.24
NetD10_A on Supply "HB-Sup" (solid, pour order 59): 3539.2,3126.2 3609.29,3196.29 3610,3196 3622,3209 3933.07,3208.65 3933,3208 4012,3208 4031.5,3188.98 4031.5,2917.32 3937.01,2822.83 3937.01,2661.42 3854.33,2578.74 3564.26,2578.74 3540.28,2602.72
+12V3 on Supply "Sup-HeatBed" (solid, pour order 50): 3921.26,2385.83 3948.82,2358.27 4212.6,2358.27 4224.41,2370.08 4224.41,2653.54 4425.2,2854.33 4425.2,3012.8 4338.58,3099.41 4146.65,3099.41 4047.24,3000 4047.24,2742.01 3921.26,2616.02
USBVCC on Supply "Top-No Net" (solid, pour order 31): 2030,2150 2050,2170 2050,2420 1990,2480 1990,2960 1830,3120 1490,3120 1420,3050 1420,2780 1490,2710 1490,2290 1450,2250 1450,2170 1470,2150
VCC on Supply "Top-VCC2" (solid, pour order 44): 2610.24,3665.35 2645.67,3700.79 3204.72,3700.79 3452.76,3452.76 3452.76,2964.57 3393.7,2905.51 3208.66,2905.51 2740.16,2905.51 2614.17,3031.5
12V-IN on Supply "12VIN-Sup" (solid, remove dead copper, pour order 54): 4744.09,1574.8 4744.09,1881.89 4696.85,1929.13 4460.63,1929.13 4440.94,1948.82 4271.65,1948.82 4224.41,1996.06 4224.41,2259.84 4216.54,2267.72 3952.76,2267.72 3937.01,2251.97 3937.01,1858.27 4220.47,1574.8
VCC on Supply "Top-VCC" (solid, pour order 34): 1137.8,1866.14 3275.59,1866.14 3350.39,1940.94 3350.39,1972.44 3259.84,2062.99 3259.84,3610.24 3192.91,3677.17 1401.57,3677.17 1362.2,3637.8 1362.2,3299.21 1468.5,3192.91 1921.26,3192.91 2027.56,3086.61 2027.56,2484.25 2066.93,2444.88 2129.92,2444.88 2141.73,2433.07 2141.73,2161.42 2114.17,2133.86 1125.98,2133.86 1039.37,2047.24 1039.37,1964.57
NetD6_A on Supply "Heat-Sup" (solid, pour order 57): 3592,3646 3623.17,3677.17 4106.3,3677.17 4133.86,3649.61 4133.86,3429.13 4110.24,3405.51 3647.49,3405.51 3592,3461
+12V3 on Top "HB-IN-12V" (solid, pour order 47): 3905.51,2342.52 3988,2343 3988,2430 4028,2470 4146,2470 4145.67,2629.92 4125.98,2649.61 3929.13,2649.61 3905.51,2625.98
12V-IN on Top "12VIN-Bot" (solid, remove dead copper, pour order 55): 4744.09,1547.24 4744.09,1881.89 4696.85,1929.13 4460.63,1929.13 4440.94,1948.82 4271.65,1948.82 4178,2042.47 4178,2267.72 3952.76,2267.72 3937.01,2251.97 3937.01,1835.63 4225.39,1547.24
NetD10_A on Top "Top-HeatBed" (solid, pour order 48): 3537,2601 3559.26,2578.74 3798.74,2578.74 3844,2624 3899,2624 3937.01,2662.01 3937.01,3177.17 3933.07,3181.1 3565,3181.1 3537,3152.37
GND on Top "GND" (solid, pour order 33): 3660,3284 3681,3305 3681,3307 3931.02,3307 3931.1,3307.09 3931.1,3188.98 3663.39,3188.98 3661.42,3190.94 3660,3192.36 3660,3284
GND on Top "Top-GND-ICoupler" (solid, pour order 32): 1992.13,2496.06 1944.88,2448.82 1944.88,2192.91 1901.57,2149.61 1901.57,2133.86 1913.39,2122.05 2157.48,2122.05 2216.54,2181.1 2216.54,2393.7 2181.1,2429.13 2070.87,2429.13 2003.94,2496.06
GND1 on Top "Top-GND1" (solid, pour order 38): 1022.64,2146.65 1879.92,2146.65 1933.07,2199.8 1933.07,2453.74 1990.16,2510.83 1990.16,2970.47 1835.63,3125 1482.28,3125 1355.32,2998.03 1356.3,2997.05 1356.3,2834.65 1022.64,2834.65
GND on Top "Top-GND-ADC" (solid, pour order 42): 3334.65,2933.07 3425.2,2933.07 3448.82,2909.45 3440.94,2901.57 3440.94,2574.8 3440.94,2566.93 3472.44,2535.43 3795.28,2535.43 3822.83,2507.87 3822.83,2181.1 3775.59,2133.86 3775.59,2011.81 3759.84,1996.06 3031.5,1996.06 2893.7,2133.86 2893.7,2889.9 2964.57,2960.76 3306.95,2960.76 3334.65,2933.07
NetD6_A on Top "Top-Heater2" (solid, pour order 41): 3901.57,3610.24 4035.43,3610.24 4098.43,3673.23 4330.71,3673.23 4374.02,3629.92 4374.02,3551.18 4314.96,3492.13 4307.09,3484.25 3897.64,3484.25 3897.64,3610.24
GND1 on Top "Top-CryGND1" (solid, pour order 40): 1686.02,2629.92 1686.02,2539.37 1648.62,2501.97 1583.66,2501.97 1539.37,2457.68 1539.37,2324.8 1593.5,2270.67 1715.55,2270.67 1734.25,2289.37 1734.25,2318.9 1747.05,2331.69 1747.05,2481.3 1789.37,2523.62 1761.81,2551.18 1761.81,2631.89
GND on Top "Top-MotorThermal" (solid, pour order 45): 1059.06,1791.34 1086.61,1818.9 3464.57,1818.9 3503.94,1779.53 3503.94,1433.07 3421.26,1350.39 1090.55,1350.39 1059.06,1381.89 1059.06,1389.76
+12V2 on Top "12V2-fuse" (solid, pour order 46): 4263.78,2346.46 4300.61,2322.83 4834.65,2322.83 4834.65,2472.44 4693.46,2562.99 4570.7,2562.99 4497.04,2610.24 4269.92,2610.24 4263.78,2614.17
GND on Top "12V-Diode-GND" (solid, pour order 51): 3421.26,1228.35 3598.43,1228.35 3618.11,1208.66 3618.11,1122.05 3547.24,1051.18 3437.01,1051.18 3409.45,1078.74 3409.45,1216.54 3421.26,1228.35
NetD6_A on Top "Top-Extruder" (solid, pour order 35): 3584,3728 3584,3500 3593,3492 3602,3492 3811.02,3492.13 3811.02,3389.76 3897.64,3389.76 3921.26,3413.39 3921.26,3728.35
NetD10_A on Top "Top-HeatBed2" (solid, pour order 39): 4188.68,3106 4330.41,3106 4381.89,3157.48 4381.89,3232.28 4318.9,3295.28 4153.54,3295.28 4141.73,3283.46 4141.73,3059.06
GND1 on GND (split plane): 1990.96,2969.35 1990.96,2510.97 1934.39,2454.39 1933.28,2452.74 1932.89,2450.79 1932.89,2199.95 1880.76,2147.81 1004.35,2147.81 1004.35,2834.9 1405.51,2834.9 1407.46,2835.29 1409.12,2836.4 1410.22,2838.05 1410.61,2840 1410.61,3053.4 1482.11,3124.9 1835.41,3124.9
GND on GND (split plane): 5098.01,1004.35 1004.35,1004.35 1004.35,2137.62 1882.87,2137.62 1884.82,2138.01 1886.48,2139.11 1941.6,2194.23 1942.7,2195.88 1943.09,2197.83 1943.09,2448.68 1999.67,2505.25 2000.77,2506.91 2001.16,2508.86 2001.16,2971.46 2000.77,2973.41 1999.67,2975.06 1841.12,3133.6 1839.47,3134.71 1837.52,3135.1 1480,3135.1 1478.05,3134.71 1476.4,3133.6 1401.91,3059.12 1400.8,3057.46 1400.41,3055.51 1400.41,2845.1 1004.35,2845.1 1004.35,3759.43 5098.01,3759.43

## Other copper
Top:
  rectangle net GND: 3586,3400 3748.03,3480.32
  rectangle net NetD10_A: 3586.61,2972.44 3968.5,3177
  rectangle net NetD6_A: 3586.61,3496.06 3830.71,3696.85
  rectangle net GND: 2964.57,1401.57 3019.68,1448.82
  rectangle net GND: 3114.17,1401.57 3169.29,1448.82
  rectangle net GND: 2220.47,1397.64 2275.59,1444.88
  rectangle net GND: 2070.87,1397.64 2125.98,1444.88
  rectangle net GND: 1779.53,1397.64 1834.65,1444.88
  rectangle net GND: 1637.8,1405.51 1692.91,1452.76
  rectangle net GND: 1334.65,1405.51 1389.76,1452.76
  rectangle net GND: 1188.98,1405.51 1244.09,1452.76
  rectangle net +12V3: 3905.51,2342.52 3986,2511.02
  rectangle net GND: 3960.63,2732.28 4055.12,2866.14
  rectangle net GND: 3614.17,2303.15 3759.84,2511.81
  rectangle net GND: 3492.13,1106.3 3598.43,1228.35
  region net +12V: 3338.58,1618.11 3338.58,1649.61 3330.71,1657.48 3291.34,1657.48 3291.34,1637.8 3318.9,1610.24 3330.71,1610.24
  region net +12V: 1094.49,1633.86 1094.49,1677.17 1090.55,1681.1 1082.68,1681.1 1055.12,1653.54 1055.12,1641.73 1062.99,1633.86
  region net +12V: 1541.54,1665.35 1557.23,1649.66 1557.23,1635.97 1531.5,1610.24 1496.06,1610.24 1472.44,1633.86 1472.44,1653.54 1484.25,1665.35
  region net +12V: 1988.19,1661.42 1996.06,1653.54 1996.06,1633.86 1976.38,1614.17 1937.01,1614.17 1917.32,1633.86 1917.32,1653.54 1925.2,1661.42
  region net NetD10_A: 3923,2972.44 4055.12,2972.44 4153.54,3070.87 4153.54,3295.28 4102.36,3244.09 4027.56,3244.09 3964.57,3181.1 3923,3181.1
  region net +12V: 2362.2,1594.49 2401.57,1594.49 2409.45,1602.36 2409.45,1614.17 2377.95,1645.67 2374.02,1645.67 2358.27,1629.92 2358.27,1602.36 2362.2,1598.43
  region net +12V: 2881.89,1590.55 2881.89,1638.98 2881.75,1639.12 2871.4,1639.12 2830.71,1598.43 2830.71,1590.55 2842.52,1578.74 2874.02,1578.74
Supply:
  rectangle net GND: 1110.24,1417.32 1472.44,1850.39
  rectangle net GND: 1555.12,1417.32 1913.39,1850.39
  rectangle net GND: 2000,1417.32 2342.52,1850.39
  rectangle net GND: 2893.7,1417.32 3303.15,1850.39
GND (plane layer: these items are gaps in the copper):
  pour cut-out: 3623.03,3652.56 3623.03,3545.28 3633.86,3534.45 3785.43,3534.45 3797.24,3546.26 3797.24,3656.5 3782.48,3671.26 3638.78,3671.26 3624.02,3656.5
  pour cut-out: 3632.87,3129.92 3632.87,3022.64 3643.7,3011.81 3795.28,3011.81 3807.09,3023.62 3807.09,3133.86 3792.32,3148.62 3648.62,3148.62 3633.86,3133.86
  lines w10: 984.25,2142.72 1882.87,2142.72 1937.99,2197.83 1937.99,2450.79 1996.06,2508.86 1996.06,2971.46 1837.52,3130 1480,3130 1405.51,3055.51 1405.51,2840 984.25,2840

## Silkscreen, mask and mechanical layers (free items; w line width, h text height)
Top Overlay:
  circle w5: c1087.93,1374.52 r42
  lines w6: 4230,1540 4320,1540 4320,1470 4430,1470 4430,1660 4230,1660 4230,1540
  text "Extruder" at 3641,3710 h40
  text "Fan" at 4732.28,3708.66 h42
  text "X-MIN" at 1472.44,3688.98 h32
  text "Y-MIN" at 1885.83,3688.98 h32
  text "Z-MIN" at 2295.28,3688.98 h32
  text "-" at 4902,3567 h32
  text "X-MAX" at 1464.57,3204.72 h32
  text "Y-MAX" at 1874.02,3204.72 h32
  text "Z-MAX" at 2287.4,3204.72 h32
  text "Bed" at 3839,3146 h40
  text "ICSP-1" at 1637.8,3133.86 h32
  text "ICSP" at 2200.79,3125.98 h32
  text "Fan2" at 3158,3005 h40
  text "T0" at 3484.25,2744.09 h50
  text "Hardware" at 4628.11,2679.84 h32 r90
  text "TX" at 1996.06,2669.29 h32
  text "RX" at 2000,2614.17 h32
  text "1" at 3318.9,2512.99 h32 r90
  text "T1" at 3484.25,2444.88 h50
  text "1" at 1050,2325 h32
  text "1" at 3298.9,2312.99 h32 r90
  text "Open Source" at 4624.17,2305.83 h32 r90
  text "s" at 1279,2287 h32
  text "-" at 1219,2276 h32
  text "+" at 1153,2275 h32
  text "T2" at 3480.32,2141.73 h50
  text "UltiMachine" at 1039.37,2118.11 h32
  text "Mini-Rambo-ATX 1.0a" at 1724.41,2118.11 h32
  text "UltiMachine" at 4628.11,1951.5 h32 r90
  text "5V" at 3523.62,1673.23 h32
  text "5V" at 4250,1600 h38
  text "SB" at 4250,1550 h38
  text "Z MOTOR 1" at 2500,1535.43 h32
  text "U" at 1066.93,1342.52 h60
  text "X MOTOR" at 1496.06,1309.06 h32
  text "Y MOTOR" at 2017.72,1309.06 h32
  text "E MOTOR" at 3044.37,1308.82 h32
  text "Z MOTOR 2" at 2500,1259.84 h32
Bottom Overlay:
  text "UltiMachine" at 1365,2120 h32
Dimension:
  the board outline again, w8
PCB Document:
  lines w10: 3385.83,1496.06 3385.83,1653.54 3622.05,1653.54 3622.05,1496.06 3385.83,1496.06 ; 3626,2629 3937.01,2629 3937.01,2975 3626,2975 3626,2629
  text "UL" at 3818.9,2755.91 h30 r90
  text "ROHS" at 3425.2,1574.8 h30

## Dimensions
1181.1,1181.1 to 984.25,984.25 on Top Document
984.25,984.25 to 1181.1,1181.1 on Top Document
1181.1,1181.1 to 4921.26,1181.1 on Top Document
5118.11,984.25 to 5118.11,3779.53 on Top Document
5118.11,3779.53 to 984.25,3779.53 on Top Document

## Text inside footprints (layer, text, board x,y; h text height)
C5: Top Overlay "+" at 4082.68,1500 h77.5 r270; Top Overlay "+" at 4082.68,1586.61 h77.5 r270
P3: Top Overlay "2" at 3570,3766 h32 r270; Top Overlay "1" at 3327,3773 h32 r270; Top Overlay "10" at 3580,3331 h32 r270
X1: Top Document "1" at 3356,1811.52 h62
X3: Top Overlay "4" at 4333.03,3511.02 h77.5 r90; Top Overlay "3" at 4333.03,3311.02 h77.5 r90; Top Overlay "2" at 4333.03,3111.02 h77.5 r90; Top Overlay "1" at 4333.03,2926.02 h77.5 r90
X5: Top Document "1" at 1786.32,3283.96 h62
X7: Top Document "1" at 2199.7,3283.96 h62
X9: Top Document "1" at 4454.43,3559.55 h62
X11: Top Document "1" at 1372.93,3283.96 h62
X12: Top Document "1" at 3287.89,2262.11 h62 r270
X21: Top Document "1" at 2524.7,3645.18 h62 r180
X22: Top Document "1" at 2111.32,3645.18 h62 r180
X23: Top Document "1" at 1697.93,3645.18 h62 r180
X27: Top Document "1" at 3287.89,2884.15 h62 r270
X28: Top Document "1" at 3287.89,2573.13 h62 r270